# Altium PCB 2014-9-14呼叫器.PcbDoc (part 2 of 2)
Units mm, origin at the board's own origin, x right, y up, seen from the top; angles counter-clockwise.
Board outline 60 x 92 mm, 2 copper layers (Top Layer, Bottom Layer); 55 components, 35 nets, 210 pads, 44 vias.
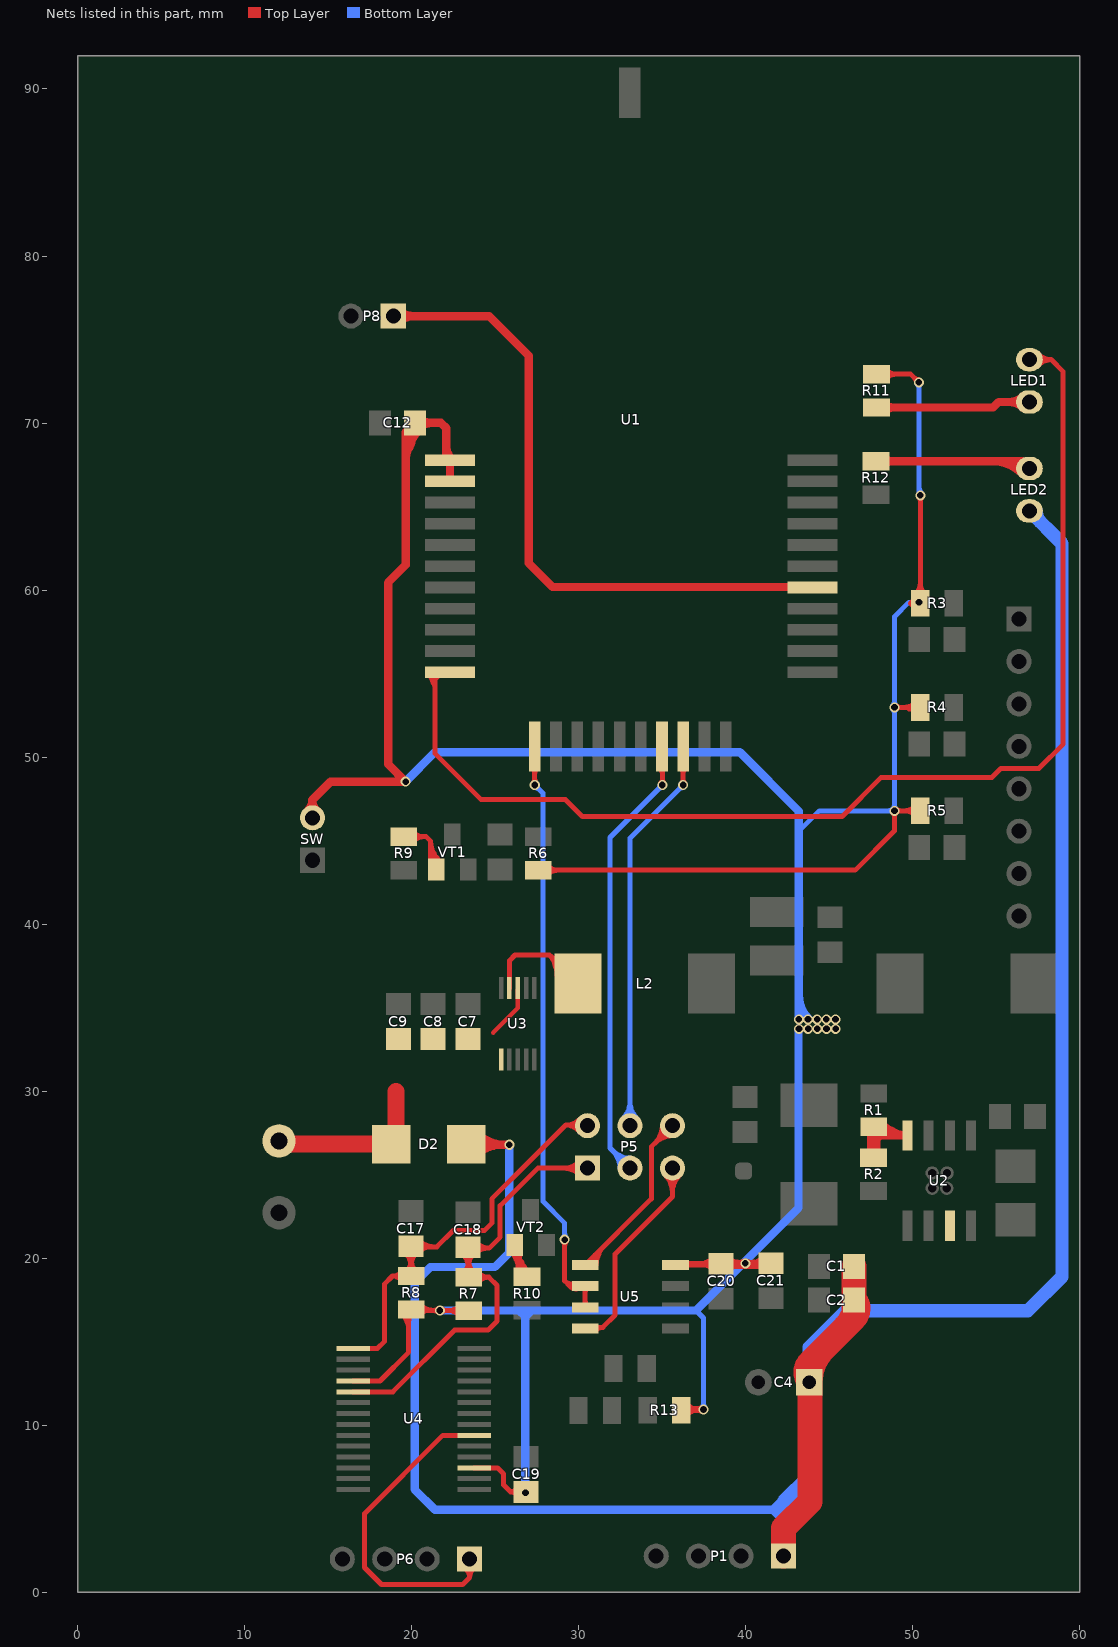
[diagram p2: the nets of this part, all layers, seen from the top]

## Via types
v1: diameter 0.6, hole 0.4, Top Layer to Bottom Layer, 44 vias

## Nets (pads, with @x,y where several pads share a name; then routed paths per layer and width w, separated by ;. In a path a pad name is that pad's centre, name@x,y a point inside that pad or via, vN(x,y) a via of type N, cw(c..) or ccw(c..) an arc to the next point about the centre after c; other vN are vias at no path point) (continued)
NetL2_1: L2.1 U3.9 | length 17.7
  Top Layer w0.27: U3.9@25.852,36.081 U3.9@25.852,36.181
  Top Layer w0.3: U3.9@25.852,36.181 25.852,37.822 26.19,38.16 28.24,38.16 ; L2.1@28.554,37.679 ccw(c30.294,38.025) L2.1@29.795,36.322 ; L2.1@29.95,36.45 28.24,38.16 ; 28.24,38.16 cw(c27.115,37.035) 28.703,36.931 ccw(c27.115,37.035) 28.24,38.16 ; 28.24,38.16 ccw(c28.95,38.87) 29.395,37.97 cw(c28.95,38.87) 28.24,38.16 ; 28.536,37.864 ccw(c29.146,38.474) 29.528,37.701 cw(c29.146,38.474) 28.536,37.864 ; L2.1@28.708,37.692 cw(c27.994,36.978) 29.002,36.912 ccw(c27.994,36.978) L2.1@28.708,37.692
NetLED1_1: LED1.1 R11.2 | length 12.1
  Top Layer w0.5: R11.2@47.82,70.93 54.81,70.93 55.14,71.26 LED1.1@56.98,71.26 ; R11.2@48.282,70.718 cw(c48.794,70.206) 48.794,70.93 cw(c48.794,71.654) R11.2@48.282,71.142 ; LED1.1@56.562,70.942 ccw(c55.794,70.174) 55.794,71.26 ccw(c55.794,72.346) LED1.1@56.562,71.578
NetLED2_2: LED2.2 R12.2 | length 14
  Top Layer w0.5: R12.2@48.02,67.95 R12.2@47.79,67.72 56.54,67.72 LED2.2@56.98,67.28 ; R12.2@48.252,67.508 cw(c48.764,66.996) 48.764,67.72 cw(c48.764,68.444) R12.2@48.252,67.932 ; 54.731,67.72 cw(c54.731,65.131) LED2.2@56.562,66.962 ; 55.938,67.72 cw(c55.938,66.338) LED2.2@56.915,67.315
NetP6_1: P6.1 U4.20 | length 21.2
  Top Layer w0.3: P6.1@23.141,1.498 cw(c22.743,0.89) 23.47,0.89 ; P6.1@23.47,2 23.47,0.89 ; U4.20@23.739,9.41 21.87,9.41 17.18,4.72 17.18,1.49 18.193,0.477 23.057,0.477 23.47,0.89 ; P6.1@23.799,1.498 ccw(c24.197,0.89) 23.47,0.89
NetR1_1: R1.1 R2.1 U2.4 | length 12.3
  Top Layer w0.5: 47.66,26.98 48.03,27.35 U2.4@49.676,27.35 ; R1.1@48.04,27.6 cw(c48.414,26.823) 48.906,27.531 ; R1.1@47.757,27.741 ccw(c48.599,28.452) 48.599,27.35 ; R1.1@47.757,27.741 ccw(c48.599,28.452) 48.599,27.35 ; R1.1@47.757,27.741 ccw(c48.599,28.452) 48.599,27.35 ; R1.1@47.757,27.741 ccw(c48.599,28.452) 48.599,27.35 ; U2.4@49.676,27.35 cw(c49.676,29.362) 48.139,28.064 ccw(c49.676,29.362) U2.4@49.676,27.35
  Top Layer w0.8: R2.1@47.65,26.03 47.66,26.04 47.66,26.98 R1.1@47.66,27.92
NetR9_1: R9.1 VT1.1 | length 28.6
  Top Layer w0.3: R9.1@19.53,45.24 20.87,45.24 21.14,44.97 ; VT1.1@21.16,43.51 21.14,43.53 21.14,44.97 ; R9.1@20.063,44.957 cw(c20.746,44.274) 20.746,45.24 ; R9.1@20.063,44.957 cw(c20.746,44.274) 20.746,45.24 ; R9.1@20.063,44.957 cw(c20.746,44.274) 20.746,45.24 ; R9.1@20.063,44.957 cw(c20.746,44.274) 20.746,45.24 ; R9.1@20.063,45.523 ccw(c20.746,46.206) 20.746,45.24 ; R9.1@20.063,45.523 ccw(c20.746,46.206) 20.746,45.24 ; R9.1@20.063,45.523 ccw(c20.746,46.206) 20.746,45.24 ; R9.1@20.063,45.523 ccw(c20.746,46.206) 20.746,45.24 ; 21.14,44.296 ccw(c22.269,44.296) VT1.1@21.513,43.457 ; 21.14,44.296 ccw(c22.269,44.296) VT1.1@21.513,43.457 ; 21.14,44.296 ccw(c22.269,44.296) VT1.1@21.513,43.457 ; 21.14,44.296 ccw(c22.269,44.296) VT1.1@21.513,43.457 ; 21.14,44.97 ccw(c22.876,44.97) VT1.1@21.714,43.68 ; 21.14,44.97 ccw(c22.876,44.97) VT1.1@21.714,43.68 ; 21.14,44.97 ccw(c22.876,44.97) VT1.1@21.714,43.68 ; 21.14,44.97 ccw(c22.876,44.97) VT1.1@21.714,43.68 ; VT1.1@21.198,43.627 ccw(c20.984,43.785) 21.207,43.929 ; VT1.1@21.198,43.627 ccw(c20.984,43.785) 21.207,43.929 ; VT1.1@21.198,43.627 ccw(c20.984,43.785) 21.207,43.929 ; VT1.1@21.198,43.627 ccw(c20.984,43.785) 21.207,43.929 ; VT1.1@21.198,43.627 ccw(c20.984,43.785) 21.207,43.929 ; 21.207,43.929 ccw(c21.501,44.12) VT1.1@21.49,43.77 ; 21.207,43.929 ccw(c21.501,44.12) VT1.1@21.49,43.77 ; 21.207,43.929 ccw(c21.501,44.12) VT1.1@21.49,43.77 ; 21.207,43.929 ccw(c21.501,44.12) VT1.1@21.49,43.77 ; 21.207,43.929 ccw(c21.501,44.12) VT1.1@21.49,43.77 ; VT1.1@21.236,43.671 ccw(c20.883,44.032) 21.307,44.307 ; VT1.1@21.236,43.671 ccw(c20.883,44.032) 21.307,44.307 ; VT1.1@21.236,43.671 ccw(c20.883,44.032) 21.307,44.307 ; VT1.1@21.236,43.671 ccw(c20.883,44.032) 21.307,44.307 ; VT1.1@21.236,43.671 ccw(c20.883,44.032) 21.307,44.307 ; VT1.1@21.445,43.456 ccw(c21.143,43.765) 21.506,44.001 ; VT1.1@21.445,43.456 ccw(c21.143,43.765) 21.506,44.001 ; VT1.1@21.445,43.456 ccw(c21.143,43.765) 21.506,44.001 ; VT1.1@21.445,43.456 ccw(c21.143,43.765) 21.506,44.001 ; VT1.1@21.445,43.456 ccw(c21.143,43.765) 21.506,44.001
NetR10_1: R10.1 VT2.1 | length 45.8
  Top Layer w0.3: 26.343,19.754 cw(c26.034,19.445) R10.1@26.361,19.155 ; VT2.1@26.39,20.73 26.39,19.41 R10.1@26.91,18.89 ; 26.568,19.529 cw(c26.273,19.233) R10.1@26.585,18.956 ; VT2.1@25.995,20.347 cw(c25.273,19.096) 26.668,19.47 ; VT2.1@25.995,20.347 cw(c25.273,19.096) 26.668,19.47 ; VT2.1@25.995,20.347 cw(c25.273,19.096) 26.668,19.47 ; VT2.1@25.995,20.347 cw(c25.273,19.096) 26.668,19.47 ; VT2.1@25.995,20.347 cw(c25.273,19.096) 26.668,19.47 ; VT2.1@26.145,20.607 cw(c25.785,19.983) VT2.1@26.481,20.169 ; VT2.1@26.145,20.607 cw(c25.785,19.983) VT2.1@26.481,20.169 ; VT2.1@26.145,20.607 cw(c25.785,19.983) VT2.1@26.481,20.169 ; VT2.1@26.145,20.607 cw(c25.785,19.983) VT2.1@26.481,20.169 ; VT2.1@26.145,20.607 cw(c25.785,19.983) VT2.1@26.481,20.169 ; 26.201,20.095 ccw(c27.567,20.461) R10.1@26.86,19.236 ; 26.201,20.095 ccw(c27.567,20.461) R10.1@26.86,19.236 ; 26.201,20.095 ccw(c27.567,20.461) R10.1@26.86,19.236 ; 26.309,20.045 cw(c26.522,20.168) VT2.1@26.377,20.367 ; 26.309,20.045 cw(c26.522,20.168) VT2.1@26.377,20.367 ; 26.309,20.045 cw(c26.522,20.168) VT2.1@26.377,20.367 ; 26.309,20.045 cw(c26.522,20.168) VT2.1@26.377,20.367 ; R10.1@26.314,19.09 ccw(c25.865,19.349) 26.365,19.483 ; R10.1@26.314,19.09 ccw(c25.865,19.349) 26.365,19.483 ; R10.1@26.314,19.09 ccw(c25.865,19.349) 26.365,19.483 ; R10.1@26.389,19.395 ccw(c27.055,19.574) R10.1@26.71,18.977 ; R10.1@26.389,19.395 ccw(c27.055,19.574) R10.1@26.71,18.977 ; R10.1@26.389,19.395 ccw(c27.055,19.574) R10.1@26.71,18.977 ; 26.39,19.783 ccw(c27.553,19.783) R10.1@26.731,18.961 ; 26.39,19.783 ccw(c27.553,19.783) R10.1@26.731,18.961 ; 26.39,19.783 ccw(c27.553,19.783) R10.1@26.731,18.961 ; 26.39,19.783 ccw(c27.553,19.783) R10.1@26.731,18.961 ; VT2.1@26.39,20.508 ccw(c28.278,20.508) R10.1@26.943,19.173 ; VT2.1@26.39,20.508 ccw(c28.278,20.508) R10.1@26.943,19.173 ; VT2.1@26.39,20.508 ccw(c28.278,20.508) R10.1@26.943,19.173 ; VT2.1@26.39,20.508 ccw(c28.278,20.508) R10.1@26.943,19.173 ; R10.1@26.413,19.205 ccw(c26.303,19.345) R10.1@26.458,19.434 ; R10.1@26.413,19.205 ccw(c26.303,19.345) R10.1@26.458,19.434 ; R10.1@26.413,19.205 ccw(c26.303,19.345) R10.1@26.458,19.434 ; R10.1@26.413,19.205 ccw(c26.303,19.345) R10.1@26.458,19.434 ; R10.1@26.413,19.205 ccw(c26.303,19.345) R10.1@26.458,19.434 ; R10.1@26.431,19.218 ccw(c26.167,19.595) 26.566,19.826 ; R10.1@26.431,19.218 ccw(c26.167,19.595) 26.566,19.826 ; R10.1@26.431,19.218 ccw(c26.167,19.595) 26.566,19.826 ; R10.1@26.431,19.218 ccw(c26.167,19.595) 26.566,19.826 ; R10.1@26.431,19.218 ccw(c26.167,19.595) 26.566,19.826 ; R10.1@26.458,19.434 ccw(c26.71,19.58) R10.1@26.689,19.289 ; R10.1@26.458,19.434 ccw(c26.71,19.58) R10.1@26.689,19.289 ; R10.1@26.458,19.434 ccw(c26.71,19.58) R10.1@26.689,19.289 ; R10.1@26.458,19.434 ccw(c26.71,19.58) R10.1@26.689,19.289 ; R10.1@26.458,19.434 ccw(c26.71,19.58) R10.1@26.689,19.289 ; R10.1@26.603,18.972 ccw(c26.355,19.326) 26.729,19.542 ; R10.1@26.603,18.972 ccw(c26.355,19.326) 26.729,19.542 ; R10.1@26.603,18.972 ccw(c26.355,19.326) 26.729,19.542 ; R10.1@26.603,18.972 ccw(c26.355,19.326) 26.729,19.542 ; R10.1@26.603,18.972 ccw(c26.355,19.326) 26.729,19.542 ; VT2.1@25.939,20.387 cw(c25.064,19.391) 26.39,19.391 ccw(c25.064,19.391) VT2.1@25.939,20.387 ; VT2.1@26.137,20.612 cw(c25.646,20.053) 26.39,20.053 ccw(c25.646,20.053) VT2.1@26.137,20.612 ; VT2.1@26.143,20.333 cw(c25.545,19.735) 26.39,19.735 ccw(c25.545,19.735) VT2.1@26.143,20.333 ; VT2.1@26.212,20.622 ccw(c26.571,20.382) 26.265,20.077 cw(c26.571,20.382) VT2.1@26.212,20.622 ; VT2.1@26.461,20.456 ccw(c26.881,20.175) 26.524,19.818 cw(c26.881,20.175) VT2.1@26.461,20.456
PA1: LED1.2 U1.11 | length 90.4
  Top Layer w0.3: U1.11@21.1,54.98 21.41,54.67 ; U1.11@21.72,54.98 21.41,54.67 ; LED1.2@56.98,73.8 58.28,73.8 ; U1.11@21.005,54.939 cw(c20.026,53.96) 21.41,53.96 ; U1.11@21.005,54.939 cw(c20.026,53.96) 21.41,53.96 ; U1.11@21.005,54.939 cw(c20.026,53.96) 21.41,53.96 ; U1.11@21.005,54.939 cw(c20.026,53.96) 21.41,53.96 ; U1.11@21.136,54.88 cw(c21.122,54.592) 21.41,54.592 ; U1.11@21.136,54.88 cw(c21.122,54.592) 21.41,54.592 ; U1.11@21.136,54.88 cw(c21.122,54.592) 21.41,54.592 ; U1.11@21.136,54.88 cw(c21.122,54.592) 21.41,54.592 ; U1.11@21.217,55.151 cw(c20.75,54.684) 21.41,54.684 ; U1.11@21.217,55.151 cw(c20.75,54.684) 21.41,54.684 ; U1.11@21.217,55.151 cw(c20.75,54.684) 21.41,54.684 ; U1.11@21.217,55.151 cw(c20.75,54.684) 21.41,54.684 ; 21.307,54.415 cw(c21.779,54.687) U1.11@21.316,54.975 ; 21.307,54.415 cw(c21.779,54.687) U1.11@21.316,54.975 ; 21.307,54.415 cw(c21.779,54.687) U1.11@21.316,54.975 ; 21.307,54.415 cw(c21.779,54.687) U1.11@21.316,54.975 ; 21.307,54.415 cw(c21.779,54.687) U1.11@21.316,54.975 ; 21.41,54.67 cw(c21.641,54.901) 21.334,55.012 ccw(c21.641,54.901) 21.41,54.67 ; 21.41,54.67 21.41,50.21 24.16,47.46 29.21,47.46 30.23,46.44 45.76,46.44 48.11,48.79 54.74,48.79 55.28,49.33 57.55,49.33 59,50.78 59,73.08 58.28,73.8 ; LED1.2@57.497,73.441 cw(c58.28,72.766) 58.28,73.8 ; LED1.2@57.497,73.441 cw(c58.28,72.766) 58.28,73.8 ; LED1.2@57.497,73.441 cw(c58.28,72.766) 58.28,73.8 ; LED1.2@57.497,73.441 cw(c58.28,72.766) 58.28,73.8 ; LED1.2@57.497,74.159 ccw(c58.28,74.834) 58.28,73.8 ; LED1.2@57.497,74.159 ccw(c58.28,74.834) 58.28,73.8 ; LED1.2@57.497,74.159 ccw(c58.28,74.834) 58.28,73.8 ; LED1.2@57.497,74.159 ccw(c58.28,74.834) 58.28,73.8 ; U1.11@21.313,54.971 ccw(c21.465,54.871) 21.337,54.743 cw(c21.465,54.871) U1.11@21.313,54.971
SHINENG: U1.12 U5.2 U5.3 | length 53.5
  Top Layer w0.3: v1(27.368,48.33) U1.12@27.368,50.643 ; v1@29.054,21.004 v1@29.16,21.11 ; v1(29.16,21.12) v1@29.16,21.11 ; U5.3@30.336,17.12 U5.3@30.39,17.066 U5.2@30.39,18.336 ; U5.2@30.384,18.33 U5.2@30.39,18.336 ; U1.12@27.227,49.352 cw(c26.885,49.01) 27.368,49.01 ; U1.12@27.227,49.352 cw(c26.885,49.01) 27.368,49.01 ; U1.12@27.227,49.352 cw(c26.885,49.01) 27.368,49.01 ; U1.12@27.227,49.352 cw(c26.885,49.01) 27.368,49.01 ; v1@27.262,48.436 ccw(c27.006,48.692) 27.368,48.692 ; v1@27.262,48.436 ccw(c27.006,48.692) 27.368,48.692 ; v1@27.262,48.436 ccw(c27.006,48.692) 27.368,48.692 ; v1@27.262,48.436 ccw(c27.006,48.692) 27.368,48.692 ; v1@27.262,48.436 ccw(c27.006,48.692) 27.368,48.692 ; 27.368,48.692 ccw(c27.73,48.692) v1@27.474,48.436 ; 27.368,48.692 ccw(c27.73,48.692) v1@27.474,48.436 ; 27.368,48.692 ccw(c27.73,48.692) v1@27.474,48.436 ; 27.368,48.692 ccw(c27.73,48.692) v1@27.474,48.436 ; 27.368,48.692 ccw(c27.73,48.692) v1@27.474,48.436 ; 27.368,49.01 cw(c27.851,49.01) U1.12@27.509,49.352 ; 27.368,49.01 cw(c27.851,49.01) U1.12@27.509,49.352 ; 27.368,49.01 cw(c27.851,49.01) U1.12@27.509,49.352 ; 27.368,49.01 cw(c27.851,49.01) U1.12@27.509,49.352 ; 29.16,18.654 ccw(c29.649,19.143) 29.847,18.48 cw(c29.649,19.143) 29.16,18.654 ; 29.16,18.654 v1@29.16,21.11 ; 29.16,18.654 29.477,18.336 U5.2@30.39,18.336 ; 29.16,20.758 cw(c29.522,20.758) 29.266,21.014 ccw(c29.522,20.758) 29.16,20.758 ; 29.16,20.758 ccw(c28.798,20.758) 29.054,21.014 cw(c28.798,20.758) 29.16,20.758 ; 29.528,18.336 cw(c29.528,17.974) 29.784,18.23 ccw(c29.528,17.974) 29.528,18.336 ; 29.528,18.336 ccw(c29.528,18.698) 29.784,18.442 cw(c29.528,18.698) 29.528,18.336 ; U5.3@30.284,17.172 ccw(c30.028,17.428) 30.39,17.428 ; U5.3@30.284,17.172 ccw(c30.028,17.428) 30.39,17.428 ; U5.3@30.284,17.172 ccw(c30.028,17.428) 30.39,17.428 ; U5.3@30.284,17.172 ccw(c30.028,17.428) 30.39,17.428 ; 30.39,17.428 ccw(c30.752,17.428) U5.3@30.496,17.172 ; 30.39,17.428 ccw(c30.752,17.428) U5.3@30.496,17.172 ; 30.39,17.428 ccw(c30.752,17.428) U5.3@30.496,17.172 ; 30.39,17.428 ccw(c30.752,17.428) U5.3@30.496,17.172 ; 30.39,17.974 cw(c30.752,17.974) 30.496,18.23 ccw(c30.752,17.974) 30.39,17.974 ; 30.39,17.974 ccw(c30.028,17.974) 30.284,18.23 cw(c30.028,17.974) 30.39,17.974 ; 29.516,18.298 ccw(c29.813,18.595) 29.933,18.193 cw(c29.813,18.595) 29.516,18.298
  Bottom Layer w0.3: v1(27.368,48.33) 27.37,48.33 27.858,47.842 27.858,23.41 29.16,22.108 v1(29.16,21.12) ; v1@27.368,48.18 cw(c27.368,47.813) 27.627,48.073 ; v1@27.368,48.18 cw(c27.368,47.813) 27.627,48.073 ; v1@27.368,48.18 cw(c27.368,47.813) 27.627,48.073 ; v1@27.368,48.18 cw(c27.368,47.813) 27.627,48.073 ; v1@27.368,48.18 cw(c27.368,47.813) 27.627,48.073 ; v1@27.518,48.33 ccw(c27.875,48.33) 27.623,48.077 ; v1@27.518,48.33 ccw(c27.875,48.33) 27.623,48.077 ; v1@27.518,48.33 ccw(c27.875,48.33) 27.623,48.077 ; v1@27.518,48.33 ccw(c27.875,48.33) 27.623,48.077 ; v1@27.518,48.33 ccw(c27.875,48.33) 27.623,48.077 ; 29.16,21.482 cw(c28.798,21.482) 29.054,21.226 ccw(c28.798,21.482) 29.16,21.482 ; 29.16,21.482 ccw(c29.522,21.482) 29.266,21.226 cw(c29.522,21.482) 29.16,21.482
SRST: P8.1 U1.26 | length 43.5
  Top Layer w0.5: P8.1@18.9,76.4 24.64,76.4 27,74.04 27,61.62 28.43,60.19 U1.26@44.6,60.19 ; 20.107,76.4 cw(c20.107,77.607) 19.254,76.754 ccw(c20.107,77.607) 20.107,76.4 ; 20.107,76.4 ccw(c20.107,75.193) 19.254,76.046 cw(c20.107,75.193) 20.107,76.4
UART_RXD: P5.5 U1.19 | length 39.6
  Top Layer w0.3: v1(36.25,48.33) 36.25,50.635 U1.19@36.258,50.643 ; U1.19@36.117,49.352 cw(c35.794,49.029) 36.25,49.029 ; U1.19@36.117,49.352 cw(c35.794,49.029) 36.25,49.029 ; U1.19@36.117,49.352 cw(c35.794,49.029) 36.25,49.029 ; U1.19@36.117,49.352 cw(c35.794,49.029) 36.25,49.029 ; v1@36.144,48.436 ccw(c35.888,48.692) 36.25,48.692 ; v1@36.144,48.436 ccw(c35.888,48.692) 36.25,48.692 ; v1@36.144,48.436 ccw(c35.888,48.692) 36.25,48.692 ; v1@36.144,48.436 ccw(c35.888,48.692) 36.25,48.692 ; v1@36.144,48.436 ccw(c35.888,48.692) 36.25,48.692 ; 36.25,48.692 ccw(c36.612,48.692) v1@36.356,48.436 ; 36.25,48.692 ccw(c36.612,48.692) v1@36.356,48.436 ; 36.25,48.692 ccw(c36.612,48.692) v1@36.356,48.436 ; 36.25,48.692 ccw(c36.612,48.692) v1@36.356,48.436 ; 36.25,48.692 ccw(c36.612,48.692) v1@36.356,48.436 ; 36.25,48.991 cw(c36.76,48.991) U1.19@36.399,49.352 ; 36.25,48.991 cw(c36.76,48.991) U1.19@36.399,49.352 ; 36.25,48.991 cw(c36.76,48.991) U1.19@36.399,49.352 ; 36.25,48.991 cw(c36.76,48.991) U1.19@36.399,49.352
  Bottom Layer w0.3: P5.5@33.07,27.94 33.07,45.15 v1(36.25,48.33) ; P5.5@32.646,28.364 ccw(c31.621,29.389) 33.07,29.389 ; P5.5@32.646,28.364 ccw(c31.621,29.389) 33.07,29.389 ; P5.5@32.646,28.364 ccw(c31.621,29.389) 33.07,29.389 ; 33.07,29.389 ccw(c34.519,29.389) P5.5@33.494,28.364 ; 33.07,29.389 ccw(c34.519,29.389) P5.5@33.494,28.364 ; 33.07,29.389 ccw(c34.519,29.389) P5.5@33.494,28.364 ; 35.994,48.074 cw(c36.25,47.818) v1@36.25,48.18 ; 35.994,48.074 ccw(c35.738,48.33) v1@36.1,48.33 ; 35.994,48.074 cw(c36.25,47.818) v1@36.25,48.18 ; 35.994,48.074 ccw(c35.738,48.33) v1@36.1,48.33 ; 35.994,48.074 cw(c36.25,47.818) v1@36.25,48.18 ; 35.994,48.074 ccw(c35.738,48.33) v1@36.1,48.33 ; 35.994,48.074 cw(c36.25,47.818) v1@36.25,48.18 ; 35.994,48.074 ccw(c35.738,48.33) v1@36.1,48.33 ; 35.994,48.074 cw(c36.25,47.818) v1@36.25,48.18 ; 35.994,48.074 ccw(c35.738,48.33) v1@36.1,48.33
"UART_RXD 485": P5.6 U5.1 | length 43.4
  Top Layer w0.3: U5.1@30.39,19.606 34.35,23.566 34.35,26.68 P5.6@35.61,27.94 ; U5.1@30.44,19.606 cw(c30.561,19.606) U5.1@30.475,19.692 ; U5.1@30.44,19.606 cw(c30.561,19.606) U5.1@30.475,19.692 ; U5.1@30.44,19.606 cw(c30.561,19.606) U5.1@30.475,19.692 ; U5.1@30.44,19.606 cw(c30.561,19.606) U5.1@30.475,19.692 ; U5.1@30.74,19.606 cw(c31.585,19.606) 30.987,20.204 ; U5.1@30.74,19.606 cw(c31.585,19.606) 30.987,20.204 ; U5.1@30.74,19.606 cw(c31.585,19.606) 30.987,20.204 ; U5.1@30.74,19.606 cw(c31.585,19.606) 30.987,20.204 ; U5.1@30.815,19.736 ccw(c30.387,20.478) 31.214,20.256 ; U5.1@30.815,19.736 ccw(c30.387,20.478) 31.214,20.256 ; U5.1@30.815,19.736 ccw(c30.387,20.478) 31.214,20.256 ; U5.1@30.815,19.736 ccw(c30.387,20.478) 31.214,20.256 ; U5.1@30.815,19.736 ccw(c30.387,20.478) 31.214,20.256 ; U5.1@31.04,19.606 cw(c32.609,19.606) 31.5,20.716 ; U5.1@31.04,19.606 cw(c32.609,19.606) 31.5,20.716 ; U5.1@31.04,19.606 cw(c32.609,19.606) 31.5,20.716 ; U5.1@31.04,19.606 cw(c32.609,19.606) 31.5,20.716 ; 34.586,26.916 cw(c35.61,25.891) P5.6@35.61,27.34 ; 34.586,26.916 ccw(c33.561,27.94) P5.6@35.01,27.94 ; 34.586,26.916 cw(c35.61,25.891) P5.6@35.61,27.34 ; 34.586,26.916 ccw(c33.561,27.94) P5.6@35.01,27.94 ; 34.586,26.916 cw(c35.61,25.891) P5.6@35.61,27.34 ; 34.586,26.916 ccw(c33.561,27.94) P5.6@35.01,27.94 ; 34.586,26.916 cw(c35.61,25.891) P5.6@35.61,27.34 ; 34.586,26.916 ccw(c33.561,27.94) P5.6@35.01,27.94 ; 34.807,27.184 cw(c35.82,26.913) P5.6@35.61,27.94 ; 34.807,27.184 cw(c35.82,26.913) P5.6@35.61,27.94 ; 34.807,27.184 cw(c35.82,26.913) P5.6@35.61,27.94 ; 34.807,27.184 cw(c35.82,26.913) P5.6@35.61,27.94 ; 34.807,27.184 cw(c35.82,26.913) P5.6@35.61,27.94 ; 34.854,27.137 ccw(c34.583,28.15) P5.6@35.61,27.94 ; 34.854,27.137 ccw(c34.583,28.15) P5.6@35.61,27.94 ; 34.854,27.137 ccw(c34.583,28.15) P5.6@35.61,27.94 ; 34.854,27.137 ccw(c34.583,28.15) P5.6@35.61,27.94 ; 34.854,27.137 ccw(c34.583,28.15) P5.6@35.61,27.94 ; U5.1@31.033,19.652 cw(c31.406,19.773) 31.129,20.05 ccw(c31.406,19.773) U5.1@31.033,19.652
UART_RXD_USB: C18.2 P5.1 R7.1 U4.5 | length 62.1
  Top Layer w0.3: U4.5@16.5,12.01 18.87,12.01 22.56,15.7 24.57,15.7 25.12,16.25 25.12,18.37 24.62,18.87 ; R7.1@23.3,18.75 R7.1@23.42,18.87 ; C18.2@23.37,20.66 C18.2@23.42,20.61 ; P5.1@30.53,25.4 27.55,25.4 25.3,23.15 25.3,21.27 24.64,20.61 ; C18.2@23.016,20.306 cw(c22.042,19.332) R7.1@23.42,19.332 ; C18.2@23.016,20.306 cw(c22.042,19.332) R7.1@23.42,19.332 ; C18.2@23.016,20.306 cw(c22.042,19.332) R7.1@23.42,19.332 ; C18.2@23.016,20.306 cw(c22.042,19.332) R7.1@23.42,19.332 ; R7.1@23.137,19.153 ccw(c22.454,19.836) 23.42,19.836 ; R7.1@23.137,19.153 ccw(c22.454,19.836) 23.42,19.836 ; R7.1@23.137,19.153 ccw(c22.454,19.836) 23.42,19.836 ; R7.1@23.137,19.153 ccw(c22.454,19.836) 23.42,19.836 ; R7.1@23.42,18.87 24.62,18.87 ; R7.1@23.42,18.87 C18.2@23.42,20.61 ; 23.42,19.574 cw(c24.456,19.574) C18.2@23.724,20.306 ; 23.42,19.574 cw(c24.456,19.574) C18.2@23.724,20.306 ; 23.42,19.574 cw(c24.456,19.574) C18.2@23.724,20.306 ; 23.42,19.574 cw(c24.456,19.574) C18.2@23.724,20.306 ; 23.42,19.836 ccw(c24.386,19.836) R7.1@23.703,19.153 ; 23.42,19.836 ccw(c24.386,19.836) R7.1@23.703,19.153 ; 23.42,19.836 ccw(c24.386,19.836) R7.1@23.703,19.153 ; 23.42,19.836 ccw(c24.386,19.836) R7.1@23.703,19.153 ; C18.2@23.42,20.61 24.64,20.61 ; C18.2@23.824,20.306 cw(c24.556,19.574) 24.556,20.61 ; C18.2@23.824,20.306 cw(c24.556,19.574) 24.556,20.61 ; C18.2@23.824,20.306 cw(c24.556,19.574) 24.556,20.61 ; C18.2@23.824,20.306 cw(c24.556,19.574) 24.556,20.61 ; C18.2@23.855,20.979 ccw(c24.64,21.629) 24.64,20.61 ; C18.2@23.855,20.979 ccw(c24.64,21.629) 24.64,20.61 ; C18.2@23.855,20.979 ccw(c24.64,21.629) 24.64,20.61 ; C18.2@23.855,20.979 ccw(c24.64,21.629) 24.64,20.61 ; R7.1@23.956,18.59 cw(c24.62,17.942) 24.62,18.87 ; R7.1@23.956,18.59 cw(c24.62,17.942) 24.62,18.87 ; R7.1@23.956,18.59 cw(c24.62,17.942) 24.62,18.87 ; R7.1@23.956,18.59 cw(c24.62,17.942) 24.62,18.87 ; R7.1@23.956,19.15 ccw(c24.62,19.798) 24.62,18.87 ; R7.1@23.956,19.15 ccw(c24.62,19.798) 24.62,18.87 ; R7.1@23.956,19.15 ccw(c24.62,19.798) 24.62,18.87 ; R7.1@23.956,19.15 ccw(c24.62,19.798) 24.62,18.87 ; 29.081,25.4 cw(c29.081,23.951) P5.1@30.106,24.976 ; 29.081,25.4 ccw(c29.081,26.849) P5.1@30.106,25.824 ; 29.081,25.4 cw(c29.081,23.951) P5.1@30.106,24.976 ; 29.081,25.4 ccw(c29.081,26.849) P5.1@30.106,25.824 ; 29.081,25.4 cw(c29.081,23.951) P5.1@30.106,24.976 ; 29.081,25.4 ccw(c29.081,26.849) P5.1@30.106,25.824 ; 29.081,25.4 cw(c29.081,23.951) P5.1@30.106,24.976 ; 29.081,25.4 ccw(c29.081,26.849) P5.1@30.106,25.824
UART_TXD: P5.2 U1.18 | length 49.6
  Top Layer w0.3: U1.18@34.988,50.643 35.01,50.621 v1(35.01,48.33) ; U1.18@34.847,49.352 cw(c34.452,48.957) 35.01,48.957 ; U1.18@34.847,49.352 cw(c34.452,48.957) 35.01,48.957 ; U1.18@34.847,49.352 cw(c34.452,48.957) 35.01,48.957 ; U1.18@34.847,49.352 cw(c34.452,48.957) 35.01,48.957 ; v1@34.904,48.436 ccw(c34.648,48.692) 35.01,48.692 ; v1@34.904,48.436 ccw(c34.648,48.692) 35.01,48.692 ; v1@34.904,48.436 ccw(c34.648,48.692) 35.01,48.692 ; v1@34.904,48.436 ccw(c34.648,48.692) 35.01,48.692 ; v1@34.904,48.436 ccw(c34.648,48.692) 35.01,48.692 ; 35.01,48.692 ccw(c35.372,48.692) v1@35.116,48.436 ; 35.01,48.692 ccw(c35.372,48.692) v1@35.116,48.436 ; 35.01,48.692 ccw(c35.372,48.692) v1@35.116,48.436 ; 35.01,48.692 ccw(c35.372,48.692) v1@35.116,48.436 ; 35.01,48.692 ccw(c35.372,48.692) v1@35.116,48.436 ; 35.01,49.063 cw(c35.418,49.063) U1.18@35.129,49.352 ; 35.01,49.063 cw(c35.418,49.063) U1.18@35.129,49.352 ; 35.01,49.063 cw(c35.418,49.063) U1.18@35.129,49.352 ; 35.01,49.063 cw(c35.418,49.063) U1.18@35.129,49.352
  Bottom Layer w0.3: v1(35.01,48.33) 31.87,45.19 31.87,26.6 P5.2@33.07,25.4 ; 32.046,26.424 cw(c31.021,25.4) P5.2@32.47,25.4 ; 32.046,26.424 ccw(c33.07,27.449) P5.2@33.07,26 ; 32.046,26.424 cw(c31.021,25.4) P5.2@32.47,25.4 ; 32.046,26.424 ccw(c33.07,27.449) P5.2@33.07,26 ; 32.046,26.424 cw(c31.021,25.4) P5.2@32.47,25.4 ; 32.046,26.424 ccw(c33.07,27.449) P5.2@33.07,26 ; 32.267,26.156 ccw(c33.28,26.427) P5.2@33.07,25.4 ; 32.267,26.156 ccw(c33.28,26.427) P5.2@33.07,25.4 ; 32.267,26.156 ccw(c33.28,26.427) P5.2@33.07,25.4 ; 32.314,26.203 cw(c32.043,25.19) P5.2@33.07,25.4 ; 32.314,26.203 cw(c32.043,25.19) P5.2@33.07,25.4 ; 32.314,26.203 cw(c32.043,25.19) P5.2@33.07,25.4 ; 34.754,48.074 cw(c35.01,47.818) v1@35.01,48.18 ; 34.754,48.074 ccw(c34.498,48.33) v1@34.86,48.33 ; 34.754,48.074 cw(c35.01,47.818) v1@35.01,48.18 ; 34.754,48.074 ccw(c34.498,48.33) v1@34.86,48.33 ; 34.754,48.074 cw(c35.01,47.818) v1@35.01,48.18 ; 34.754,48.074 ccw(c34.498,48.33) v1@34.86,48.33 ; 34.754,48.074 cw(c35.01,47.818) v1@35.01,48.18 ; 34.754,48.074 ccw(c34.498,48.33) v1@34.86,48.33 ; 34.754,48.074 cw(c35.01,47.818) v1@35.01,48.18 ; 34.754,48.074 ccw(c34.498,48.33) v1@34.86,48.33
"UART_TXD 485": P5.3 U5.4 | length 23.4
  Top Layer w0.3: U5.4@30.39,15.796 30.464,15.87 31.44,15.87 32.18,16.61 32.18,20.26 35.61,23.69 P5.3@35.61,25.4 ; U5.4@30.996,15.69 cw(c31.43,15.256) 31.43,15.87 ; U5.4@30.996,15.69 cw(c31.43,15.256) 31.43,15.87 ; U5.4@30.996,15.69 cw(c31.43,15.256) 31.43,15.87 ; U5.4@30.996,15.69 cw(c31.43,15.256) 31.43,15.87 ; P5.3@35.186,24.976 cw(c34.161,23.951) 35.61,23.951 ; P5.3@35.186,24.976 cw(c34.161,23.951) 35.61,23.951 ; P5.3@35.186,24.976 cw(c34.161,23.951) 35.61,23.951 ; P5.3@35.186,24.976 cw(c34.161,23.951) 35.61,23.951 ; 35.61,23.951 cw(c37.059,23.951) P5.3@36.034,24.976 ; 35.61,23.951 cw(c37.059,23.951) P5.3@36.034,24.976 ; 35.61,23.951 cw(c37.059,23.951) P5.3@36.034,24.976 ; 35.61,23.951 cw(c37.059,23.951) P5.3@36.034,24.976
UART_TXD_USB: C17.2 P5.4 R8.1 U4.1 | length 47
  Top Layer w0.3: U4.1@16.5,14.61 17.96,14.61 18.36,15.01 18.36,18.45 18.85,18.94 ; C17.2@19.96,20.73 C17.2@19.97,20.72 ; 26.03,24.79 24.8,23.56 24.8,22.11 24.35,21.66 22.475,21.66 21.505,20.69 20,20.69 C17.2@19.97,20.72 ; 26.04,24.79 29.23,27.98 ; P5.4@30.53,27.94 30.49,27.98 29.23,27.98 ; 18.85,18.94 cw(c18.85,18.194) R8.1@19.416,18.68 ; 18.85,18.94 ccw(c18.85,19.686) R8.1@19.416,19.2 ; 18.85,18.94 cw(c18.85,18.194) R8.1@19.416,18.68 ; 18.85,18.94 ccw(c18.85,19.686) R8.1@19.416,19.2 ; 18.85,18.94 cw(c18.85,18.194) R8.1@19.416,18.68 ; 18.85,18.94 ccw(c18.85,19.686) R8.1@19.416,19.2 ; 18.85,18.94 cw(c18.85,18.194) R8.1@19.416,18.68 ; 18.85,18.94 ccw(c18.85,19.686) R8.1@19.416,19.2 ; 18.85,18.94 R8.1@19.97,18.94 C17.2@19.97,20.72 ; 19.97,19.906 cw(c19.004,19.906) 19.687,19.223 ccw(c19.004,19.906) 19.97,19.906 ; 19.97,19.906 ccw(c20.936,19.906) 20.253,19.223 cw(c20.936,19.906) 19.97,19.906 ; 29.23,27.98 cw(c29.23,26.94) P5.4@30.054,27.574 ; 29.23,27.98 ccw(c29.23,29.169) P5.4@30.094,28.352 ; 29.23,27.98 cw(c29.23,26.94) P5.4@30.054,27.574 ; 29.23,27.98 ccw(c29.23,29.169) P5.4@30.094,28.352 ; 29.23,27.98 cw(c29.23,26.94) P5.4@30.054,27.574 ; 29.23,27.98 ccw(c29.23,29.169) P5.4@30.094,28.352 ; 29.23,27.98 cw(c29.23,26.94) P5.4@30.054,27.574 ; 29.23,27.98 ccw(c29.23,29.169) P5.4@30.094,28.352 ; C17.2@19.606,20.376 cw(c18.729,19.499) 19.97,19.499 ccw(c18.729,19.499) C17.2@19.606,20.376 ; 19.97,19.547 cw(c21.143,19.547) 20.314,20.376 ccw(c21.143,19.547) 19.97,19.547 ; C17.2@20.414,20.376 cw(c21.171,19.619) 21.171,20.69 ccw(c21.171,19.619) C17.2@20.414,20.376 ; C17.2@20.414,21.084 ccw(c21.364,22.034) 21.364,20.69 cw(c21.364,22.034) C17.2@20.414,21.084
VCC_9V: C7.2 C8.2 C9.2 D2.1 pad.1@12.06,27.03 U3.1 U3.8 | length 13
  Top Layer w0.254: 24.88,33.51 26.352,34.982 U3.8@26.352,36.081
  Top Layer w1: pad.1@12.22,26.84 D2.1@18.78,26.84 19.06,27.12 19.06,30
VCC_24V: C1.2 C2.2 C4.1 D2.2 LED2.1 P1.1 U2.7 | length 183
  Top Layer w0.5: D2.2@22.97,26.79 22.98,26.8 v1(25.85,26.8) ; D2.2@23.768,26.284 cw(c25.015,25.037) 25.015,26.8 ccw(c25.015,25.037) D2.2@23.768,26.284 ; D2.2@23.768,27.344 ccw(c25.082,28.658) 25.082,26.8 cw(c25.082,28.658) D2.2@23.768,27.344 ; D2.2@23.916,26.204 cw(c25.356,24.764) 25.356,26.8 ccw(c25.356,24.764) D2.2@23.916,26.204 ; D2.2@23.916,27.476 ccw(c25.549,29.109) 25.549,26.8 cw(c25.549,29.109) D2.2@23.916,27.476
  Top Layer w1.5: P1.1@42.26,2.18 42.26,3.85 43.84,5.43 43.84,13.77 ; C4.1@43.839,12.615 cw(c44.418,13.192) 43.84,13.77 ; C4.1@43.854,12.58 cw(c46.761,12.58) 44.705,14.635 ; C1.2@46.48,19.52 46.47,19.51 46.47,16.4 ; 43.84,13.77 46.47,16.4 ; 46.47,16.4 ccw(c45.887,16.983) 46.562,17.457 cw(c45.887,16.983) 46.47,16.4 ; 45.951,15.881 ccw(c44.431,17.4) 46.58,17.4 cw(c44.431,17.4) 45.951,15.881
  Bottom Layer w0.5: v1(25.85,26.8) 25.85,20.35 24.98,19.48 21.12,19.48 20.18,18.54 20.18,6.17 21.4,4.95 41.62,4.95 ; 42.15,5.48 41.62,4.95 ; 42.26,4.31 41.62,4.95
  Bottom Layer w0.8: P1.1@42.013,2.427 ccw(c41.415,3.025) 42.26,3.025 ccw(c43.105,3.025) P1.1@42.507,2.427 ; P1.1@42.26,2.18 42.26,4.31 42.26,5.37 42.296,5.406 ; 42.26,5.442 43.804,6.986 C4.1@43.804,12.58 ; C4.1@43.521,12.863 ccw(c42.838,13.546) 43.804,13.546 ccw(c44.77,13.546) C4.1@44.087,12.863 ; 43.84,6.95 43.84,12.544 C4.1@43.804,12.58 ; 43.84,11.527 ccw(c42.751,11.527) 43.521,12.297 cw(c42.838,11.614) 43.804,11.614 cw(c44.77,11.614) 44.087,12.297 ccw(c44.683,11.701) 43.84,11.701 ; LED2.1@56.98,64.74 58.93,62.79 58.93,18.9 56.89,16.86 45.98,16.86 43.804,14.684 C4.1@43.804,12.58 ; LED2.1@57.38,64.74 ccw(c58.346,64.74) 57.663,64.057 ; LED2.1@57.38,64.74 ccw(c58.346,64.74) 57.663,64.057 ; LED2.1@57.38,64.74 ccw(c58.346,64.74) 57.663,64.057
VDD33: C12.2 C19.2 C20.2 C21.2 R3.2 R4.2 R5.2 R6.2 R7.2 R8.2 R11.1 R13.2 SW.2 U1.1 U1.2 U4.4 U4.17 U5.8 | length 343.3
  Top Layer w0.3: U4.4@16.5,12.66 18.1,12.66 19.82,14.38 19.82,16.79 R8.2@19.97,16.94 20.03,16.88 23.41,16.88 R7.2@23.48,16.81 ; U4.17@23.739,7.46 25.14,7.46 25.51,7.09 25.51,6.43 25.92,6.02 ; C19.2@26.85,6.02 25.92,6.02 ; R6.2@27.57,43.24 46.55,43.24 48.9,45.59 v1(48.9,46.79) 49.85,46.79 ; U5.8@35.79,19.606 C20.2@38.52,19.606 ; U5.8@35.864,19.68 C20.2@38.52,19.68 ; R13.2@36.24,10.95 v1(37.47,10.95) ; U5.8@36.396,19.712 ccw(c36.652,19.968) 36.652,19.606 ccw(c36.652,19.244) 36.396,19.5 cw(c36.83,19.066) 36.83,19.68 ; 37.035,19.606 ccw(c37.035,21.065) 38.066,20.034 cw(c37.213,20.887) 37.213,19.68 cw(c37.213,18.473) 38.066,19.326 ccw(c37.391,18.651) 37.391,19.606 ; 37.759,19.606 ccw(c37.759,20.341) C20.2@38.279,19.821 ; v1@44.25,34.335 v1(44.275,34.31) ; R11.1@47.82,72.93 49.87,72.93 v1(50.36,72.44) ; R11.1@48.353,72.647 cw(c49.036,71.964) 49.036,72.93 cw(c49.036,73.896) R11.1@48.353,73.213 ; v1@48.794,46.684 cw(c48.538,46.428) 48.9,46.428 cw(c49.262,46.428) 49.006,46.684 cw(c49.262,46.428) 49.262,46.79 cw(c49.262,47.152) v1@49.006,46.896 ; v1(48.9,52.98) 49.85,52.98 ; R5.2@50.12,46.52 49.85,46.79 ; R5.2@50.12,47.06 49.85,46.79 ; R4.2@50.12,53.25 49.85,52.98 ; R3.2@50.12,58.94 49.85,59.21 R3.2@50.12,59.48 ; R3.2@50.167,59.743 ccw(c49.484,60.426) 50.45,60.426 ccw(c51.416,60.426) R3.2@50.733,59.743 ; v1@50.21,72.44 ccw(c49.848,72.44) 50.104,72.696 ccw(c50.36,72.952) v1@50.36,72.59 ; R3.2@50.264,59.376 ccw(c49.815,59.825) R3.2@50.45,59.825 ; v1@50.344,65.564 cw(c50.088,65.308) 50.45,65.308 cw(c50.812,65.308) v1@50.556,65.564 ; R3.2@50.38,59.28 R3.2@50.45,59.21 v1(50.45,65.67) v1@50.45,65.77 ; R8.2@19.437,16.657 cw(c18.513,15.733) 19.82,15.733 ; R8.2@19.437,16.657 cw(c18.513,15.733) 19.82,15.733 ; R8.2@19.437,16.657 cw(c18.513,15.733) 19.82,15.733 ; R8.2@19.437,16.657 cw(c18.513,15.733) 19.82,15.733 ; 19.82,16.216 cw(c20.444,16.216) R8.2@20.003,16.657 ; 19.82,16.216 cw(c20.444,16.216) R8.2@20.003,16.657 ; 19.82,16.216 cw(c20.444,16.216) R8.2@20.003,16.657 ; 19.82,16.216 cw(c20.444,16.216) R8.2@20.003,16.657 ; R8.2@20.503,16.657 cw(c21.041,16.119) 21.041,16.88 ; R8.2@20.503,16.657 cw(c21.041,16.119) 21.041,16.88 ; R8.2@20.503,16.657 cw(c21.041,16.119) 21.041,16.88 ; R8.2@20.503,16.657 cw(c21.041,16.119) 21.041,16.88 ; R8.2@20.503,17.223 ccw(c21.331,18.051) 21.331,16.88 ; R8.2@20.503,17.223 ccw(c21.331,18.051) 21.331,16.88 ; R8.2@20.503,17.223 ccw(c21.331,18.051) 21.331,16.88 ; R8.2@20.503,17.223 ccw(c21.331,18.051) 21.331,16.88 ; 21.328,16.88 cw(c21.328,16.518) v1@21.584,16.774 ; 21.328,16.88 ccw(c21.328,17.242) v1@21.584,16.986 ; 21.328,16.88 cw(c21.328,16.518) v1@21.584,16.774 ; 21.328,16.88 ccw(c21.328,17.242) v1@21.584,16.986 ; 21.328,16.88 cw(c21.328,16.518) v1@21.584,16.774 ; 21.328,16.88 ccw(c21.328,17.242) v1@21.584,16.986 ; 21.328,16.88 cw(c21.328,16.518) v1@21.584,16.774 ; 21.328,16.88 ccw(c21.328,17.242) v1@21.584,16.986 ; 21.328,16.88 cw(c21.328,16.518) v1@21.584,16.774 ; 21.328,16.88 ccw(c21.328,17.242) v1@21.584,16.986 ; v1@21.796,16.774 cw(c22.052,16.518) 22.052,16.88 ; v1@21.796,16.774 cw(c22.052,16.518) 22.052,16.88 ; v1@21.796,16.774 cw(c22.052,16.518) 22.052,16.88 ; v1@21.796,16.774 cw(c22.052,16.518) 22.052,16.88 ; v1@21.796,16.774 cw(c22.052,16.518) 22.052,16.88 ; v1@21.796,16.986 ccw(c22.052,17.242) 22.052,16.88 ; v1@21.796,16.986 ccw(c22.052,17.242) 22.052,16.88 ; v1@21.796,16.986 ccw(c22.052,17.242) 22.052,16.88 ; v1@21.796,16.986 ccw(c22.052,17.242) 22.052,16.88 ; v1@21.796,16.986 ccw(c22.052,17.242) 22.052,16.88 ; 22.18,16.88 cw(c22.18,15.88) R7.2@22.887,16.587 ; 22.18,16.88 cw(c22.18,15.88) R7.2@22.887,16.587 ; 22.18,16.88 cw(c22.18,15.88) R7.2@22.887,16.587 ; 22.18,16.88 cw(c22.18,15.88) R7.2@22.887,16.587 ; 22.228,16.88 ccw(c22.228,17.812) R7.2@22.887,17.153 ; 22.228,16.88 ccw(c22.228,17.812) R7.2@22.887,17.153 ; 22.228,16.88 ccw(c22.228,17.812) R7.2@22.887,17.153 ; 22.228,16.88 ccw(c22.228,17.812) R7.2@22.887,17.153 ; 25.92,6.02 cw(c25.92,5.581) C19.2@26.308,5.786 ; 25.92,6.02 ccw(c25.92,6.459) C19.2@26.308,6.254 ; 25.92,6.02 cw(c25.92,5.581) C19.2@26.308,5.786 ; 25.92,6.02 ccw(c25.92,6.459) C19.2@26.308,6.254 ; 25.92,6.02 cw(c25.92,5.581) C19.2@26.308,5.786 ; 25.92,6.02 ccw(c25.92,6.459) C19.2@26.308,6.254 ; 25.92,6.02 cw(c25.92,5.581) C19.2@26.308,5.786 ; 25.92,6.02 ccw(c25.92,6.459) C19.2@26.308,6.254 ; R6.2@28.103,42.957 cw(c28.786,42.274) 28.786,43.24 ; R6.2@28.103,42.957 cw(c28.786,42.274) 28.786,43.24 ; R6.2@28.103,42.957 cw(c28.786,42.274) 28.786,43.24 ; R6.2@28.103,42.957 cw(c28.786,42.274) 28.786,43.24 ; R6.2@28.103,43.523 ccw(c28.786,44.206) 28.786,43.24 ; R6.2@28.103,43.523 ccw(c28.786,44.206) 28.786,43.24 ; R6.2@28.103,43.523 ccw(c28.786,44.206) 28.786,43.24 ; R6.2@28.103,43.523 ccw(c28.786,44.206) 28.786,43.24 ; 36.934,10.881 cw(c37.091,10.294) v1@37.395,10.82 ; 36.934,10.881 cw(c37.091,10.294) v1@37.395,10.82 ; 36.934,10.881 cw(c37.091,10.294) v1@37.395,10.82 ; 36.943,10.88 cw(c37.097,10.304) v1@37.395,10.82 ; 36.943,10.88 cw(c37.097,10.304) v1@37.395,10.82 ; 36.943,10.88 cw(c37.097,10.304) v1@37.395,10.82 ; 36.943,10.88 cw(c37.097,10.304) v1@37.395,10.82 ; 36.943,10.88 cw(c37.097,10.304) v1@37.395,10.82 ; 36.943,10.88 cw(c37.097,10.304) v1@37.395,10.82 ; 36.943,11.02 ccw(c37.097,11.596) v1@37.395,11.08 ; 36.943,11.02 ccw(c37.097,11.596) v1@37.395,11.08 ; 36.943,11.02 ccw(c37.097,11.596) v1@37.395,11.08 ; 36.943,11.02 ccw(c37.097,11.596) v1@37.395,11.08 ; 36.943,11.02 ccw(c37.097,11.596) v1@37.395,11.08 ; 36.943,11.02 ccw(c37.097,11.596) v1@37.395,11.08 ; 37.108,10.95 cw(c37.108,10.588) v1@37.364,10.844 ; 37.108,10.95 ccw(c37.108,11.312) v1@37.364,11.056 ; 37.108,10.95 cw(c37.108,10.588) v1@37.364,10.844 ; 37.108,10.95 ccw(c37.108,11.312) v1@37.364,11.056 ; 37.108,10.95 cw(c37.108,10.588) v1@37.364,10.844 ; 37.108,10.95 ccw(c37.108,11.312) v1@37.364,11.056 ; 37.108,10.95 cw(c37.108,10.588) v1@37.364,10.844 ; 37.108,10.95 ccw(c37.108,11.312) v1@37.364,11.056 ; 37.108,10.95 cw(c37.108,10.588) v1@37.364,10.844 ; 37.108,10.95 ccw(c37.108,11.312) v1@37.364,11.056 ; v1@37.206,10.95 cw(c37.206,11.916) 36.523,11.233 ccw(c37.206,11.916) v1@37.206,10.95 ; v1@37.206,10.95 ccw(c37.206,9.984) 36.523,10.667 cw(c37.206,9.984) v1@37.206,10.95 ; 49.262,52.98 cw(c49.262,53.342) 49.006,53.086 ccw(c49.262,53.342) 49.262,52.98 ; 49.262,52.98 ccw(c49.262,52.618) 49.006,52.874 cw(c49.262,52.618) 49.262,52.98 ; 49.484,46.79 cw(c49.484,45.824) R5.2@50.167,46.507 ; 49.484,46.79 ccw(c49.484,47.756) R5.2@50.167,47.073 ; 49.484,46.79 cw(c49.484,45.824) R5.2@50.167,46.507 ; 49.484,46.79 ccw(c49.484,47.756) R5.2@50.167,47.073 ; 49.484,46.79 cw(c49.484,45.824) R5.2@50.167,46.507 ; 49.484,46.79 ccw(c49.484,47.756) R5.2@50.167,47.073 ; 49.484,46.79 cw(c49.484,45.824) R5.2@50.167,46.507 ; 49.484,46.79 ccw(c49.484,47.756) R5.2@50.167,47.073 ; 49.484,52.98 cw(c49.484,52.014) R4.2@50.167,52.697 ; 49.484,52.98 ccw(c49.484,53.946) R4.2@50.167,53.263 ; 49.484,52.98 cw(c49.484,52.014) R4.2@50.167,52.697 ; 49.484,52.98 ccw(c49.484,53.946) R4.2@50.167,53.263 ; 49.484,52.98 cw(c49.484,52.014) R4.2@50.167,52.697 ; 49.484,52.98 ccw(c49.484,53.946) R4.2@50.167,53.263 ; 49.484,52.98 cw(c49.484,52.014) R4.2@50.167,52.697 ; 49.484,52.98 ccw(c49.484,53.946) R4.2@50.167,53.263 ; 49.85,46.79 cw(c49.85,46.54) R5.2@50.081,46.636 ; 49.85,46.79 ccw(c49.85,47.04) R5.2@50.081,46.944 ; 49.85,46.79 cw(c49.85,46.54) R5.2@50.081,46.636 ; 49.85,46.79 ccw(c49.85,47.04) R5.2@50.081,46.944 ; 49.85,46.79 cw(c49.85,46.54) R5.2@50.081,46.636 ; 49.85,46.79 ccw(c49.85,47.04) R5.2@50.081,46.944 ; 49.85,46.79 cw(c49.85,46.54) R5.2@50.081,46.636 ; 49.85,46.79 ccw(c49.85,47.04) R5.2@50.081,46.944 ; 49.85,52.98 cw(c49.85,52.73) R4.2@50.081,52.826 ; 49.85,52.98 ccw(c49.85,53.23) R4.2@50.081,53.134 ; 49.85,52.98 cw(c49.85,52.73) R4.2@50.081,52.826 ; 49.85,52.98 ccw(c49.85,53.23) R4.2@50.081,53.134 ; 49.85,52.98 cw(c49.85,52.73) R4.2@50.081,52.826 ; 49.85,52.98 ccw(c49.85,53.23) R4.2@50.081,53.134 ; 49.85,52.98 cw(c49.85,52.73) R4.2@50.081,52.826 ; 49.85,52.98 ccw(c49.85,53.23) R4.2@50.081,53.134 ; C19.2@26.327,6.02 cw(c26.327,5.487) 26.704,5.864 ccw(c26.327,5.487) C19.2@26.327,6.02 ; R13.2@36.413,10.627 cw(c37.192,9.848) 37.192,10.95 ccw(c37.192,9.848) R13.2@36.413,10.627 ; R13.2@36.413,11.193 ccw(c36.999,11.779) 36.999,10.95 cw(c36.999,11.779) R13.2@36.413,11.193 ; 49.768,52.898 cw(c50.079,52.587) 50.381,52.907 ccw(c50.079,52.587) 49.768,52.898
  Top Layer w0.5: SW.2@14.07,46.37 14.05,46.39 14.05,47.44 ; 19.85,68.53 ccw(c18.822,69.124) C12.2@19.853,69.712 ; U1.2@22.296,66.51 U1.1@22.296,67.78 22.08,67.996 22.08,69.69 21.76,70.01 C12.2@20.2,70.01 19.64,69.45 19.64,61.5 18.59,60.45 18.59,49.58 v1(19.64,48.53) 15.14,48.53 14.05,47.44 ; C20.2@38.52,19.606 41.206,19.606 C21.2@41.36,19.76 ; C20.2@38.903,19.397 cw(c39.408,18.892) 39.408,19.606 ; C20.2@38.903,19.963 ccw(c39.764,20.824) v1@39.764,19.606 ; 39.481,19.682 ccw(c39.639,20.273) v1@39.945,19.743 ; 39.623,19.606 ccw(c39.623,20.047) v1@39.935,19.735 ; v1@39.995,19.743 ccw(c40.309,20.287) 40.471,19.681 ; v1@40.005,19.735 ccw(c40.317,20.047) 40.317,19.606 ; v1@40.194,19.606 ccw(c40.194,20.926) C21.2@41.127,19.993 ; 40.695,19.606 cw(c40.695,18.995) C21.2@41.127,19.427 ; 14.05,47.44 cw(c13.118,47.44) 13.738,46.743 ccw(c13.118,47.44) 14.05,47.44 ; 14.05,47.44 ccw(c14.911,47.44) 14.379,46.763 cw(c14.911,47.44) 14.05,47.44 ; 19.64,68.799 cw(c21.311,68.799) C12.2@20.129,69.981 ; 19.64,68.799 cw(c21.311,68.799) C12.2@20.129,69.981 ; 19.64,68.799 cw(c21.311,68.799) C12.2@20.129,69.981 ; 19.64,68.799 cw(c21.311,68.799) C12.2@20.129,69.981 ; 19.669,69.184 cw(c20.235,68.857) C12.2@20.213,69.51 ; 19.669,69.184 cw(c20.235,68.857) C12.2@20.213,69.51 ; 19.669,69.184 cw(c20.235,68.857) C12.2@20.213,69.51 ; 19.669,69.184 cw(c20.235,68.857) C12.2@20.213,69.51 ; 19.669,69.184 cw(c20.235,68.857) C12.2@20.213,69.51 ; C12.2@19.75,69.324 ccw(c19.199,69.642) C12.2@19.814,69.806 ; C12.2@19.75,69.324 ccw(c19.199,69.642) C12.2@19.814,69.806 ; C12.2@19.75,69.324 ccw(c19.199,69.642) C12.2@19.814,69.806 ; C12.2@19.75,69.324 ccw(c19.199,69.642) C12.2@19.814,69.806 ; C12.2@19.75,69.324 ccw(c19.199,69.642) C12.2@19.814,69.806 ; 21.166,70.01 cw(c21.166,70.976) 20.483,70.293 ccw(c21.166,70.976) 21.166,70.01 ; 21.166,70.01 ccw(c21.166,69.044) 20.483,69.727 cw(c21.166,69.044) 21.166,70.01 ; 22.08,68.543 ccw(c23.059,68.543) U1.1@22.367,67.851 ; 22.08,68.543 ccw(c23.059,68.543) U1.1@22.367,67.851 ; 22.08,68.543 ccw(c23.059,68.543) U1.1@22.367,67.851 ; 22.08,68.543 ccw(c23.059,68.543) U1.1@22.367,67.851 ; 22.142,68.239 cw(c21.648,67.954) U1.1@22.199,67.806 ; 22.142,68.239 cw(c21.648,67.954) U1.1@22.199,67.806 ; 22.142,68.239 cw(c21.648,67.954) U1.1@22.199,67.806 ; 22.142,68.239 cw(c21.648,67.954) U1.1@22.199,67.806 ; 22.142,68.239 cw(c21.648,67.954) U1.1@22.199,67.806 ; 19.64,67.592 cw(c22.518,67.592) 20.483,69.627 ccw(c22.518,67.592) 19.64,67.592
  Bottom Layer w0.3: 37.02,16.88 37.47,16.43 v1(37.47,10.95) ; 43.18,46.76 43.18,45.57 44.4,46.79 v1(48.9,46.79) ; v1@48.794,46.684 ccw(c48.538,46.428) 48.538,46.79 ccw(c48.538,47.152) 48.794,46.896 ccw(c48.538,47.152) 48.9,47.152 ccw(c49.262,47.152) v1@49.006,46.896 ; v1@48.9,46.94 v1(48.9,52.98) 48.9,58.41 49.76,59.27 v1(50.37,59.27) ; v1@50.254,72.334 cw(c49.998,72.078) 50.36,72.078 cw(c50.722,72.078) v1@50.466,72.334 ; 50.36,66.249 ccw(c51.029,66.249) v1@50.556,65.776 ; v1(50.36,72.44) 50.36,65.76 v1(50.45,65.67) ; v1@37.364,11.056 ccw(c37.108,11.312) 37.47,11.312 ; v1@37.364,11.056 ccw(c37.108,11.312) 37.47,11.312 ; v1@37.364,11.056 ccw(c37.108,11.312) 37.47,11.312 ; v1@37.364,11.056 ccw(c37.108,11.312) 37.47,11.312 ; v1@37.364,11.056 ccw(c37.108,11.312) 37.47,11.312 ; 37.47,11.312 ccw(c37.832,11.312) v1@37.576,11.056 ; 37.47,11.312 ccw(c37.832,11.312) v1@37.576,11.056 ; 37.47,11.312 ccw(c37.832,11.312) v1@37.576,11.056 ; 37.47,11.312 ccw(c37.832,11.312) v1@37.576,11.056 ; 37.47,11.312 ccw(c37.832,11.312) v1@37.576,11.056 ; 48.9,52.618 cw(c49.262,52.618) 49.006,52.874 ccw(c49.262,52.618) 48.9,52.618 ; 48.9,52.618 ccw(c48.538,52.618) 48.794,52.874 cw(c48.538,52.618) 48.9,52.618 ; 48.9,53.342 cw(c48.538,53.342) 48.794,53.086 ccw(c48.538,53.342) 48.9,53.342 ; 48.9,53.342 ccw(c49.262,53.342) 49.006,53.086 cw(c49.262,53.342) 48.9,53.342 ; 50.008,59.27 cw(c50.008,58.908) 50.264,59.164 ccw(c50.008,58.908) 50.008,59.27 ; 50.008,59.27 ccw(c50.008,59.632) 50.264,59.376 cw(c50.008,59.632) 50.008,59.27
  Bottom Layer w0.5: v1(19.64,48.53) 21.41,50.3 39.64,50.3 43.18,46.76 v1(43.18,34.31) ; v1(21.69,16.88) 37.02,16.88 43.16,23.02 43.16,33.71 v1(43.19,33.74) ; 26.44,16.88 26.81,16.51 ; v1(26.81,5.97) 26.81,16.51 ; 27.18,16.88 26.81,16.51 ; 39.663,19.523 cw(c39.97,19.215) v1@39.97,19.65 ; v1@40.02,19.7 cw(c40.455,19.7) 40.147,20.007 ; 43.18,35.752 ccw(c45.17,35.752) v1@43.763,34.345 ; 43.18,35.752 ccw(c45.17,35.752) v1@43.763,34.345 ; 43.18,35.752 ccw(c45.17,35.752) v1@43.763,34.345 ; 43.18,35.752 ccw(c45.17,35.752) v1@43.763,34.345
  other v1: 39.97,19.7 43.737,33.74 44.285,33.74 44.832,33.74 45.38,33.74 43.727,34.31 44.822,34.31 45.37,34.31
pads on no net: U1. U1.3 U1.4 U1.5 U1.6 U1.8 U1.9 U1.13 U1.16 U1.17 U1.20 U1.21 U1.22 U1.23 U1.24 U1.25 U1.29 U2.2 U2.3 U2.5 U4.2 U4.3 U4.6 U4.8 U4.9 U4.10 U4.11 U4.12 U4.14 U4.19 U4.22 U4.24 U4.27 U4.28

## Polygon pours and split planes (outlines as drawn)
GND on Top Layer "Top Layer-No Net 2" (solid, remove dead copper, pour order 46): 13,0 12.8,0.2 11.48,0.2 11.48,0.31 10.91,0.88 11,0.97 11,4.08 10.99,4.08 5.8,9.27 5.81,9.28 5.81,82.75 11,87.94 11.13,88.07 12.34,88.07 12.36,88.07 20.66,79.77 20.15,80.28 20.15,80.35 24.51,80.35 24.62,80.24 25.96,78.9 25.96,78.62 25.96,54.44 27.14,53.26 27.17,53.29 39.66,53.29 40.1,53.73 41.45,55.08 41.45,55.09 41.45,81.76 41.46,81.77 44.1,84.41 44.1,84.46 52.02,84.46 52.09,84.39 55.76,80.72 55.82,80.72 59.62,80.72 59.85,80.49 59.99,80.35 59.99,11.93 59.99,11.77 59.27,11.05 59.22,11 55.93,11 49,4.07 49,1.27 49,0.95 48.07,0.02 47.9,0.19 11.88,0.19 11.56,0.19 11.04,0.71
GND on Top Layer "Top Layer-No Net 1" (solid, pour order 37): 49.2,23.22 48.88,22.9 48.88,22.32 48.88,21.13 48.77,21.02 48.68,20.93 45.48,20.93 45.03,20.48 45.03,20.28 45.03,18.25 44.77,17.99 44.67,17.89 44.04,17.89 44.04,21.69 45.6,23.25 45.73,23.38 49.36,23.38
GND on Top Layer "Top Layer" (solid, pour order 34): 46.98,66.26 46.98,65.6 46.84,65.46 46.84,64.17 46.99,64.02 48.46,64.02 48.66,64.22 48.66,66.2 48.6,66.26
GND on Top Layer "Top Layer-No Net" (solid, remove dead copper, pour order 35): 57.45,26.6 54.79,26.6 54.12,25.93 49.24,25.93 49.09,25.78 49.09,24.92 48.9,24.73 46.69,24.73 46.6,24.64 46.6,23.33 46.71,23.22 49.2,23.22 49.36,23.38 53.35,23.38 54.32,24.35 57.5,24.35 57.66,24.51 57.66,26.39
VCC_24V on Top Layer "Top Layer-No Net" (solid, remove dead copper, pour order 38): 51.81,22.81 51.81,20.98 51.2,20.37 45.88,20.37 45.73,20.22 45.73,18.82 46.47,18.08 46.9,18.08 47.59,18.77 52.17,18.77 52.7,19.3 52.7,22.74 52.57,22.87 51.87,22.87
VCC_9V on Top Layer "Top Layer-No Net" (solid, remove dead copper, pour order 49): 18.22,29.09 23.15,29.09 25.41,31.35 25.41,33.35 24.98,33.78 18.38,33.78 17.91,33.31 17.91,29.4
GND on Top Layer "Top Layer-No Net" (solid, remove dead copper, pour order 51): 18.11,34.54 24.51,34.54 25.45,35.48 25.45,39.72 24.51,40.66 18.25,40.66 17.77,40.18 17.77,34.88
GND on Top Layer "Top Layer-No Net" (solid, remove dead copper, pour order 58): 23.934,37.504 26.29,39.86 45.87,39.86 46.05,40.04 46.05,41.93 45.84,42.14 24.93,42.14 23.074,40.284
GND on Top Layer "Top Layer-No Net" (solid, remove dead copper, pour order 62): 26.8,36.67 26.8,34.66 25.81,33.67 25.81,31.46 25.87,31.4 26.83,31.4 26.9,31.47 26.9,32.75 27.83,33.68 27.83,36.67 27.77,36.73 26.86,36.73
GND on Bottom Layer "Top Layer-No Net 2" (solid, remove dead copper, pour order 44): 13.65,0.08 11.63,0.08 11.6,0.11 11,0.71 11,1.016 11,4.08 5.8,9.28 5.8,9.42 5.8,82.74 5.81,82.75 11,87.94 12.34,87.94 17.06,83.22 20.04,80.24 24.23,80.24 24.51,80.24 25.72,79.03 25.93,78.82 25.93,55.81 25.93,54.45 27.04,53.34 27.09,53.29 39.56,53.29 39.66,53.29 41.29,54.92 41.45,55.08 41.45,73.8 41.45,81.74 42.08,82.37 44.13,84.42 52.54,84.42 52.54,84.39 55.93,81 55.95,80.98 59.33,80.98 59.33,80.979 60,80.309 59.98,80.289 59.98,11.92 59.98,11.8 59.18,11 55.93,11 49,4.07 49.02,4.05 49.02,1.1 49.02,0.84 48.36,0.18 48.24,0.06 47.94,0.06 11.58,0.06 11.55,0.09
VDD33 on Bottom Layer "Top Layer-No Net 1" (solid, pour order 43): 42.88,33.11 45.64,33.11 45.78,33.25 45.78,34.71 45.67,34.82 42.85,34.82 42.74,34.71 42.74,33.25

## Keep-outs
Keep-Out Layer:
  circle w0.254: c50,11 r1.7
  circle w0.254: c50,81 r1.7
  circle w0.254: c10,81 r1.7
  circle w0.254: c10,11 r1.7
  lines w0.254: 5.8,9.27 5.8,15.23 ; 5.8,15 5.8,82.75 ; 5.81,9.27 11,4.08 11,1.016 ccw(c12.016,1.016) 12.016,0 13,0 47,0 47.73,0 ccw(c47.73,1.27) 49,1.27 49,4.07 55.93,11 58.801,11 ccw(c58.801,12.199) 60,12.199 60,13 60,79.928 ccw(c58.928,79.928) 58.928,81 55.93,81 49,87.93 49,90.805 ccw(c47.805,90.805) 47.805,92 ; 5.81,82.75 11,87.94 11,90.73 ; 11,90.678 11,90.73 ; 12.27,92 ccw(c12.27,90.73) 11,90.73 ; 13.28,92 14.01,92 48.01,92 ; 59.97,26.263 59.97,38.708 59.97,42.972 ; 59.97,42.62 59.97,79.71

## Other copper
Top Layer:
  rectangle net GND: 21.93,12.8 22.36,13.06
  rectangle net GND: 22.18,12.57 24.8,13.31
  rectangle net NetC5_1: 36.81,36.66 41.95,38.35

## Silkscreen, mask and mechanical layers (free items; w line width, h text height)
Top Overlay:
  circle w0.15: c19.55,30.14 r1.422
  circle w0.15: c19.55,39.28 r1.422
  circle w0.254: c10,81 r3
  circle w0.254: c50,81 r3
  circle w0.254: c50,11 r3
  circle w0.254: c10,11 r3
  lines w0.254: 41.27,31.21 42.09,31.21 ; 41.69,30.82 41.69,31.64 ; 43.74,36.8 44.56,36.8 ; 44.16,36.41 44.16,37.23 ; 54.2,63.53 55.02,63.53 ; 54.31,70.4 55.13,70.4 ; 54.62,63.14 54.62,63.96 ; 54.73,69.98 54.73,70.8
  text "KEY1" at 59.51,57.13 h0.8 r90
  text "KEY2" at 59.55,51.76 h0.8 r90
  text "KEY3" at 59.55,46.66 h0.8 r90
  text "GND" at 21.34,38.85 h0.8
  text "3.3V" at 40.34,35.17 h0.8
  text "DC 9V" at 21.36,30.41 h0.8
  text "JK" at 10.27,23.43 h1.52 r90
  text "GND" at 38.56,23.27 h0.8
  text "GND" at 37.87,9.27 h0.8
  text "+24V" at 44,9.11 h0.8
  text "485_B" at 30.22,4.8 h0.8
  text "485_A" at 34.48,4.8 h0.8
  text "GND" at 39.25,4.667 h0.8
  text "+24V" at 42.15,4.667 h0.8
  text "VCC" at 23.55,4.46 h0.8
  text "GND" at 14.53,4.31 h0.8
  text "D-" at 21.31,4.3 h0.8
  text "D+" at 18.39,4.21 h0.8
Top Solder:
  rectangle: 50.34,23.52 52.85,25.8

## Dimensions
14.01,92 to 13,0 on Keep-Out Layer
5.8,15 to 60,79.928 on Keep-Out Layer

## Text inside footprints (layer, text, board x,y; h text height)
L1: Top Overlay "GS" at 52.56,35.92 h0.8
L2: Top Overlay "GS" at 33.19,35.85 h0.8
P1: Top Overlay "4" at 33.24,3.04 h0.8; Top Overlay "1" at 43.45,2.82 h0.8
P5: Top Overlay "4" at 28.3,28.15 h0.8; Top Overlay "1" at 28.49,24.34 h0.8; Top Overlay "3" at 37.37,24.9 h0.8; Top Overlay "6" at 37.37,27.89 h0.8
P6: Top Overlay "1" at 24.09,3.52 h0.8 r270; Top Overlay "4" at 14.2,3.53 h0.8 r270